# Altium PCB CSAL.PcbDoc
Units mm, origin at the board's own origin, x right, y up, seen from the top; angles counter-clockwise.
Board outline 60 x 50 mm, 2 copper layers (Top Layer, Bottom Layer); 52 components, 31 nets, 154 pads, 25 vias.
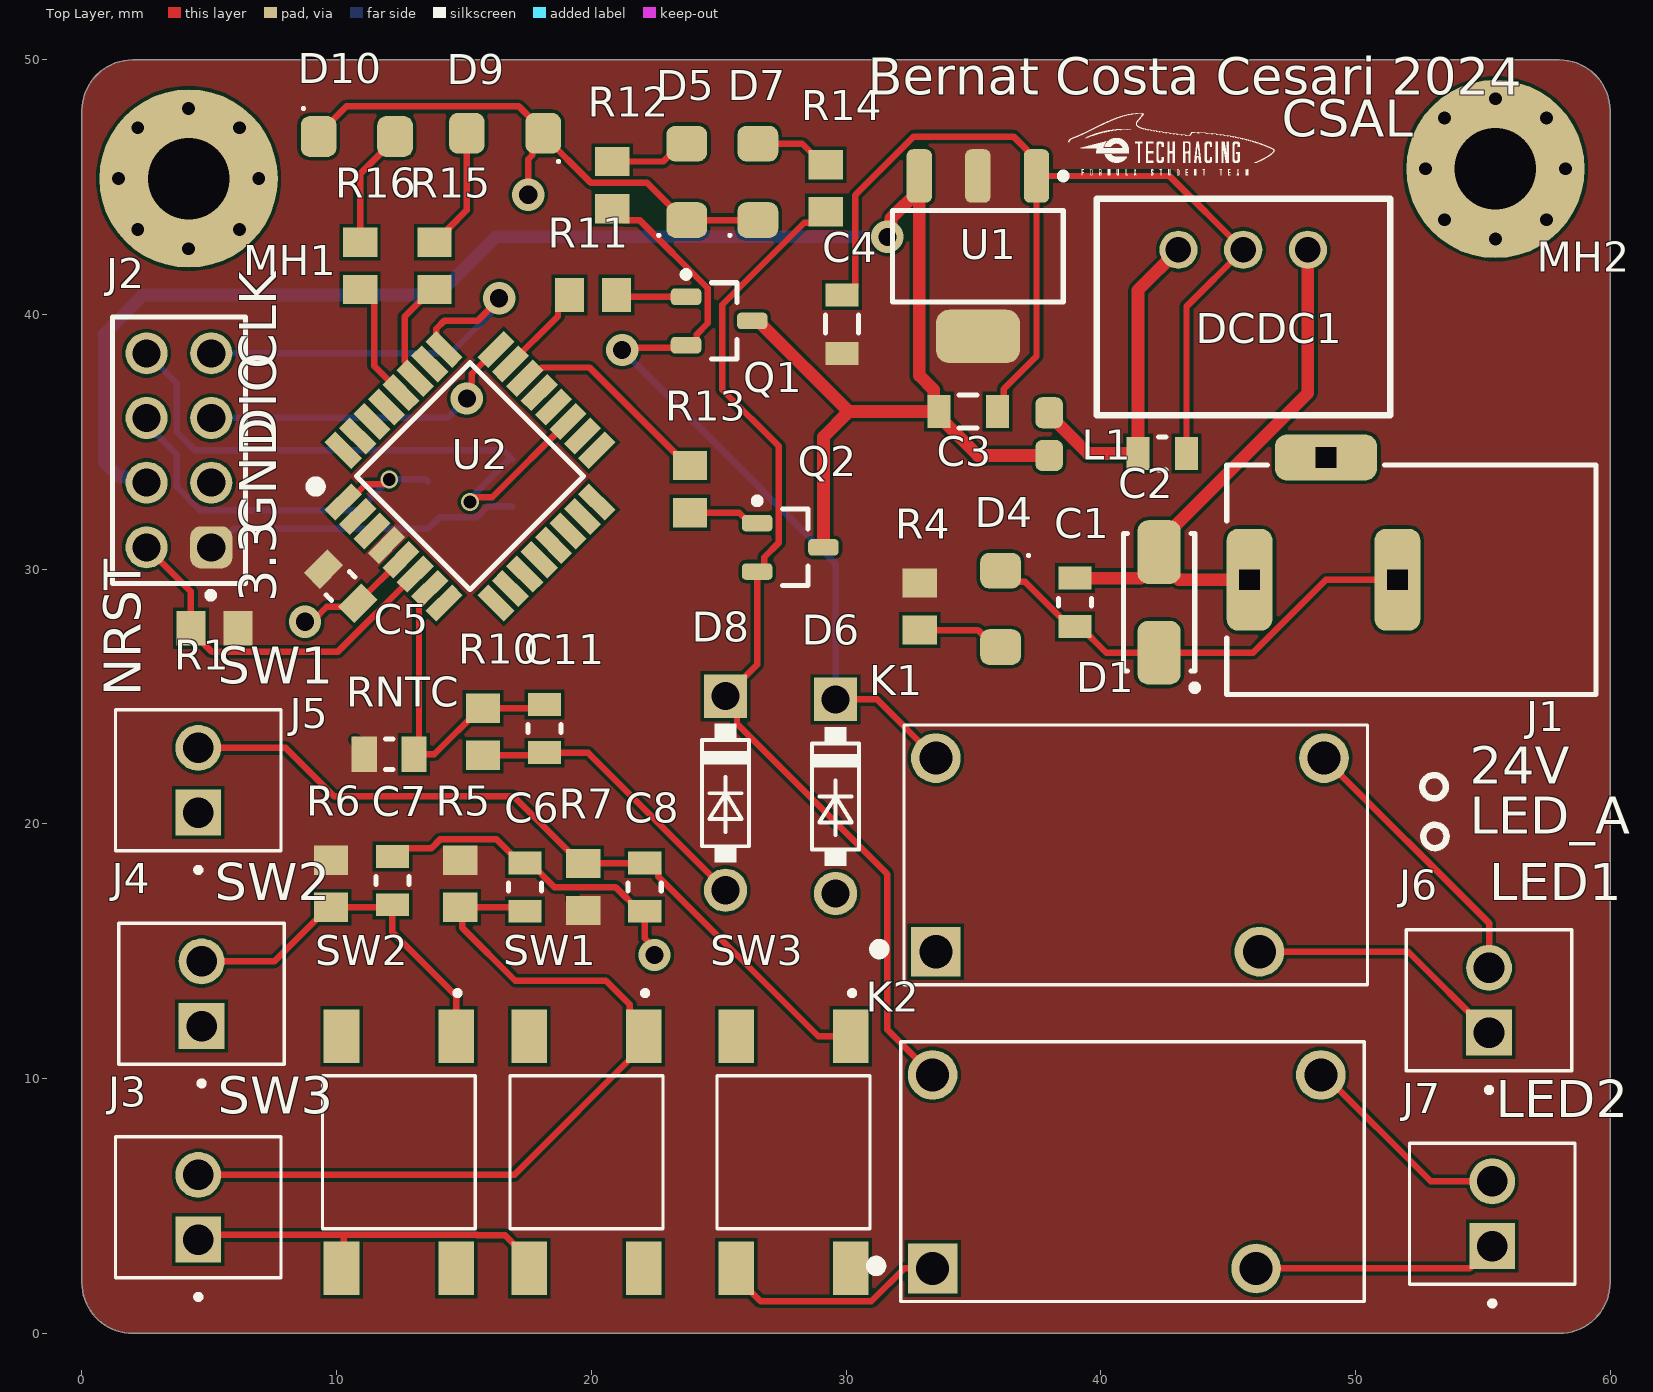
[diagram p0: Top Layer view]
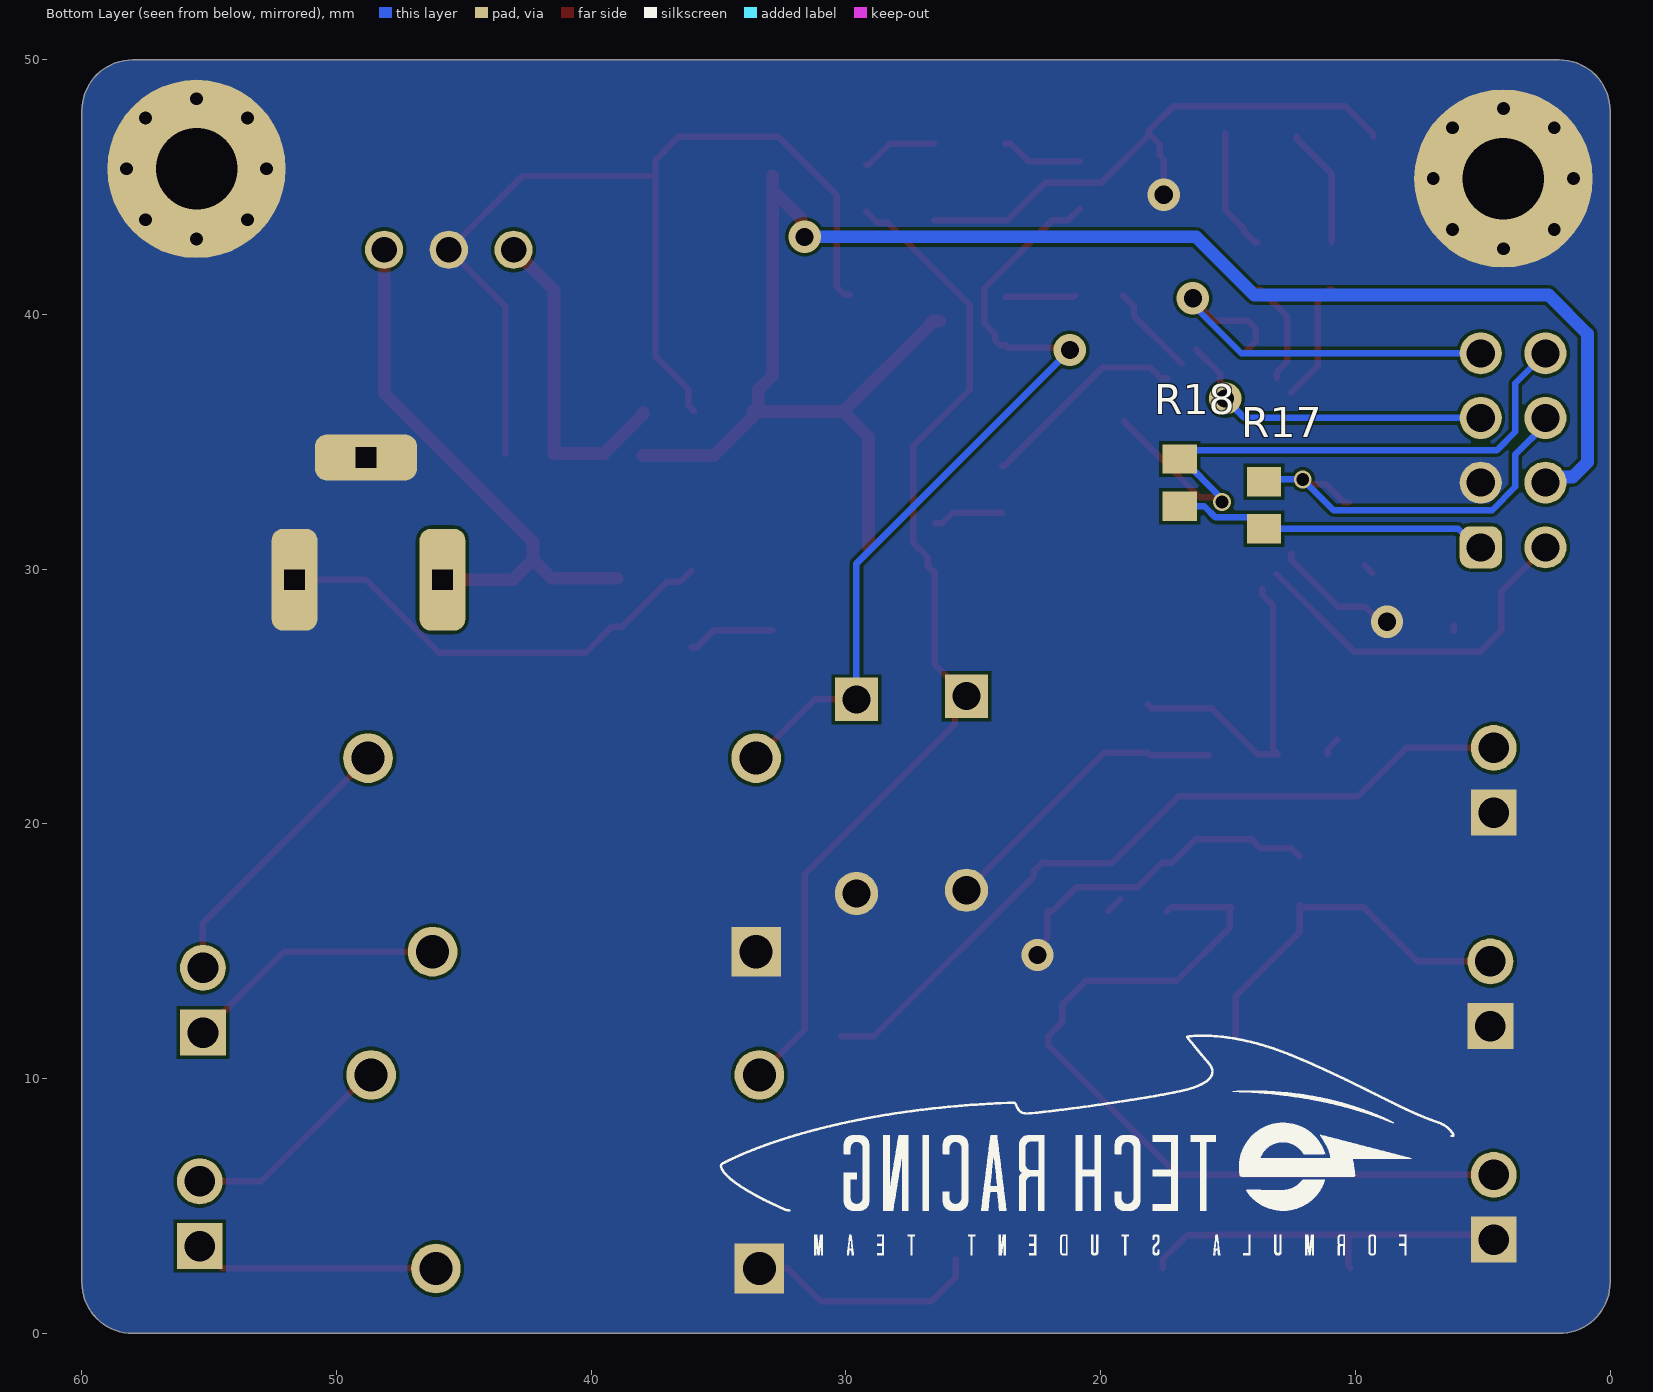
[diagram p1: Bottom Layer view, seen from below]
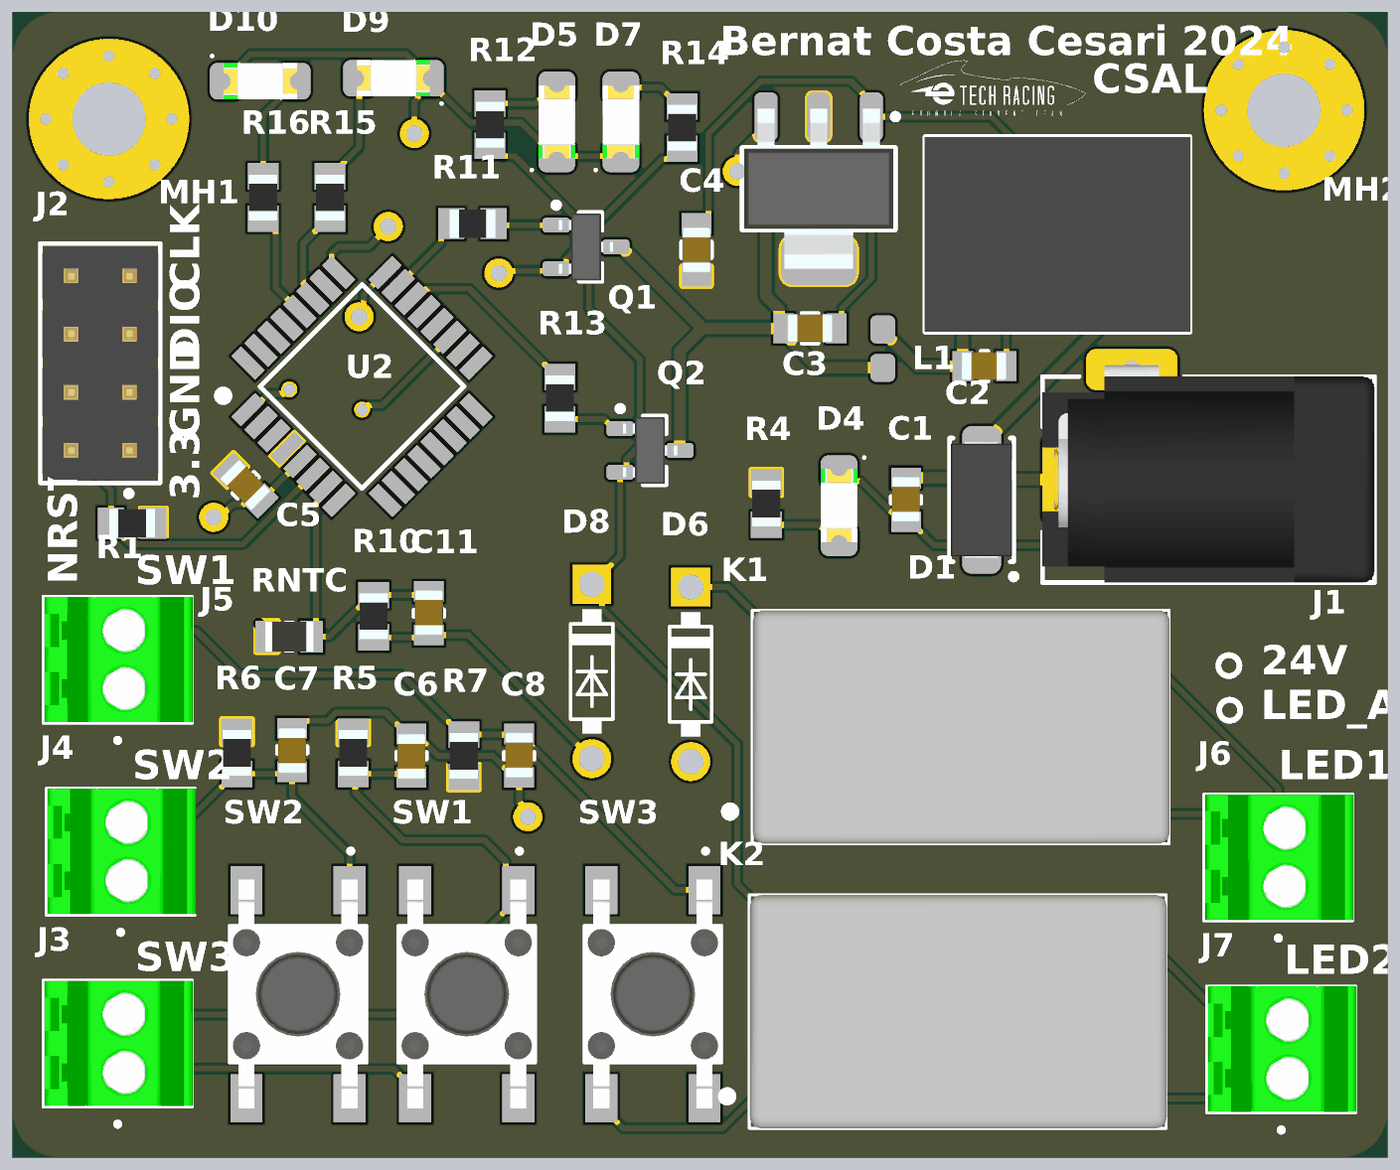
[diagram p2: 3D render of the assembled board from above, using the file's embedded part models]

## Layer stack, top to bottom
Top Solder: solder mask 0.0102, Solder Resist, Dk 3.5
Top Layer: signal copper 0.0356
Dielectric 1: dielectric 0.32, FR-4, Dk 4.8
Bottom Layer: signal copper 0.0356
Bottom Solder: solder mask 0.0102, Solder Resist, Dk 3.5

## Board outline
2,0 cw(c2,2) 0,2 0,48 cw(c2,48) 2,50 58,50 cw(c58,48) 60,48 60,2 cw(c58,2) 58,0

## Design rules (kind name [scope] priority, off if disabled: settings)
Clearance [All] p1: gap=0.127 ignorepadtopadclearanceinfootprint=FALSE
PlaneConnect [All] p1: planeconnectstyle=Direct reliefexpansion=0.508 reliefentries=4 reliefconductorwidth=0.254 reliefairgap=0.254
PolygonConnect [All] p1: connectstyle=Direct reliefconductorwidth=0.254 reliefentries=4 polygonreliefangle="90 Angle" airgapwidth=0.254
RoutingVias [All] p1: holewidth=0.5 width=0.7 viastyle="Through Hole" minholewidth=0.711 minwidth=1.27 maxholewidth=0.711 maxwidth=1.27
SolderMaskExpansion [All] p1: expansion=0.102 istentingtop=FALSE
Width [All] p1: maxlimit=0.5 minlimit=0.254 preferedwidth=0.254 minimp=50.000000 maximp=50.000000 favimp=50.000000
29 further rules are at their usual default settings.

## Components (designator, comment, footprint, x,y, rotation, side; value= is the part's Value field where it differs from the comment)
C1 "885012207098" C0805FNPC-R 38.989,28.702 r270 top
C2 "885012207098" C0805FNPC-R 42.418,34.544 r0 top
C3 "2.2uF" C0805FNPC-W 34.798,36.195 r0 top
C4 "2.2uF" C0805FNPC-W 29.845,39.624 r90 top
C5 "885012207098" C0805FNPC-R 10.16,29.337 r315 top
C6 "885012207098" C0805FNPC-R 17.399,17.526 r90 top
C7 "885012207098" C0805FNPC-R 12.192,17.78 r90 top
C8 "885012207098" C0805FNPC-R 22.098,17.526 r270 top
C11 "885012207098" C0805FNPC-R 18.161,23.749 r270 top
D1 "824501261" DTVS-DO-214AC 42.291,28.702 r270 top
D4 "150120YS75000" LED_1206_WE 36.068,28.448 r270 top
D5 "150120GS75000" LED_1206_WE 23.749,45.212 r90 top
D6 "D_THT_1N4004" D_THT 29.591,21.082 r270 top
D7 "150120RS75000" LED_1206_WE 26.543,45.212 r90 top
D8 "D_THT_1N4004" D_THT 25.273,21.209 r270 top
D9 "150120BS75000" LED_1206_WE 16.613,47.117 r180 top
D10 "150120BS75000" LED_1206_WE 10.795,46.99 r0 top
DCDC1 "173010542" DCDC_Magi3c 45.593,42.545 r0 top
J1 "694108301002" 694108301002 52.197,29.591 r90 top
J2 "STLink Wattius RJ45" STLINK_RJ45 3.81,34.671 r90 top
J3 "J_2_CableContact" TE_282834-2 4.572,4.953 r90 top
J4 "J_2_CableContact" TE_282834-2 4.699,13.335 r90 top
J5 "J_2_CableContact" TE_282834-2 4.572,21.717 r90 top
J6 "J_2_CableContact" TE_282834-2 55.245,13.081 r90 top
J7 "J_2_CableContact" TE_282834-2 55.372,4.699 r90 top
K1 "RELAY_12VDC" RELAY_1461402-6 41.148,18.786 r0 top
K2 "RELAY_12VDC" RELAY_1461402-6 41.021,6.35 r0 top
L1 "BLM18EG331TN1D" L_Ferrite_Bead_0805 37.973,35.306 r270 top
MH1 "Mounting_Hole_M3" Mounting_Hole_M3 4.191,45.339 r0 top
MH2 "Mounting_Hole_M3" Mounting_Hole_M3 55.499,45.72 r0 top
Q1 "BC817-25LT1G" TRT-NPN-0.5/45-SOT23 25.019,39.751 r0 top
Q2 "BC817-25LT1G" TRT-NPN-0.5/45-SOT23 27.813,30.861 r0 top
R1 "CR0805-JW-103ELF" R0805FTK 5.207,27.686 r180 top
R4 "CR0805-JW-102ELF" R0805FTK 32.893,28.539 r270 top
R5 "CR0805-JW-103ELF" R0805FTK 14.859,17.653 r270 top
R6 "CR0805-JW-103ELF" R0805FTK 9.779,17.653 r270 top
R7 "CR0805-JW-103ELF" R0805FTK 19.685,17.526 r90 top
R10 "CR0805-JW-103ELF" R0805FTK 15.748,23.622 r270 top
R11 "CR0805-JW-102ELF" R0805FTK 20.066,40.767 r0 top
R12 "CR0805-FX-4700GLF" R0805FTK 20.828,45.085 r90 top
R13 "CR0805-JW-102ELF" R0805FTK 23.876,33.147 r270 top
R14 "CR0805-FX-4700GLF" R0805FTK 29.21,44.958 r90 top
R15 "CR0805-FX-4700GLF" R0805FTK 13.843,41.91 r90 top
R16 "CR0805-FX-4700GLF" R0805FTK 10.922,41.91 r90 top
R17 "CR0805-JW-103ELF" R0805FTK 13.589,32.512 r90 bottom
R18 "CR0805-JW-103ELF" R0805FTK 16.891,33.401 r90 bottom
RNTC "NTC10k" NTC10k_0805 12.065,22.733 r0 top
SW1 "Tactile SW" SW_2-1437565-7 19.812,7.112 r270 top
SW2 "Tactile SW" SW_2-1437565-7 12.446,7.112 r270 top
SW3 "Tactile SW" SW_2-1437565-7 27.94,7.112 r270 top
U1 "LM1117IMP-3.3/NOPB" LDO_10V-0.8/3V3-SOT223 35.179,42.291 r270 top
U2 "STM32C031K4T6" QFP80P900X900X160-32N 15.24,33.655 r45 top

## Footprints (in the part's own frame and the unit in brackets; to place one, negate y for a bottom-side part, rotate by r counter-clockwise, add the part's x,y. Pads: shape width x height; smd on the part's side, far side on the other; paste and mask are expansions set on the pad)
694108301002 [mm] "DC Power Jack Right Angled(6.4)"
  rrect50% 4x1.8 hole 0.8 square: 1(0,6.35) 2(0,0.55)
  rrect50% 1.8x4 hole 0.8 square: 3(4.8,3.35)
  silkscreen extent -4.5,-7.25 4.5,7.25, body extent -4.5,-7.25 5,7.25, height 10.75
C0805FNPC-R [mm]
  rect 0.9x1.3 smd: 1(-0.95,0) 2(0.95,0)
  silkscreen extent -0.15,-0.65 0.15,0.65, body extent -1.03,-0.63 0.97,0.63, height 0.96
C0805FNPC-W [mm]
  rect 0.9x1.3 smd: 1(-1.15,0) 2(1.15,0)
  silkscreen extent -0.35,-0.65 0.35,0.65, body extent -1,-0.63 1,0.63, height 0.96
D_THT [mm]
  round 1.7 hole 1.1: A(3.81,0)
  rect 1.7x1.7 hole 1.1: C(-3.81,0)
  silkscreen extent -2.72,-0.95 2.72,0.92
DCDC_Magi3c [mm]
  round 1.5 hole 1: 1(2.54,0) 2(0,0) 3(-2.54,0)
  silkscreen extent -5.75,-6.5 5.77,2, body extent -5.8,-6.5 5.8,2, height 10.2
DTVS-DO-214AC [mm] "Molded Diode, 2-Leads, Body 5,11x2,67mm, IPC Medium Density"
  rrect50% 2.5x1.7 smd: 1(-1.975,0) 2(1.975,0)
  silkscreen extent -2.7,-1.4 3.47,1.53, body extent -2.56,-1.34 2.56,1.34, height 2.5
L_Ferrite_Bead_0805 [mm] "Chip Inductor, 2-Leads, Body 1,60x0,80mm, IPC Low Density"
  rrect50% 1.22x1.08 smd: 1(-0.84,0) 2(0.84,0)
  body extent -0.88,-0.48 0.87,0.47, height 0.65
LDO_10V-0.8/3V3-SOT223 [mm] "SOT223, 4-Leads, Body 6,50x7,00mm (avg), Pitch 2,30mm, IPC Low Density"
  rrect50% 2.1x1 smd: 1(-3.15,2.3) 2(-3.15,0) 3(-3.15,-2.3)
  rrect50% 2.1x3.3 smd: 4(3.15,0)
  silkscreen extent -3.27,-3.35 1.8,3.48, body extent -3.5,-3.25 3.5,3.25, height 1.81
LED_1206_WE [mm] "SODFL, 2-Leads, Body 1,60x3,20mm, IPC Medium Density"
  rrect50% 1.4x1.6 smd: A(1.5,0) K(-1.5,0)
  silkscreen extent -2.15,1.05 -2.05,1.15, body extent -1.6,-0.8 1.6,0.8, height 0.68
Mounting_Hole_M3 [mm]
  round 7 hole 3.2: 1(0,0)
NTC10k_0805 [mm] "Chip Resistor, 2-Leads, Body 1,00x0,50mm, IPC Medium Density"
  rect 1x1.4 smd: 1(-0.975,0) 2(0.975,0)
  silkscreen extent -0.15,-0.6 0.15,0.6, body extent -1.05,-0.65 1.05,0.65, height 0.8
QFP80P900X900X160-32N [mm]
  rect 1.475x0.6 smd: 1(-4.238,2.8) 2(-4.238,2) 3(-4.238,1.2) 4(-4.238,0.4) 5(-4.238,-0.4) 6(-4.238,-1.2) 7(-4.238,-2) 8(-4.238,-2.8) 17(4.238,-2.8) 18(4.238,-2) 19(4.238,-1.2) 20(4.238,-0.4) 21(4.238,0.4) 22(4.238,1.2) 23(4.238,2) 24(4.238,2.8)
  rect 0.6x1.475 smd: 9(-2.8,-4.238) 10(-2,-4.238) 11(-1.2,-4.238) 12(-0.4,-4.238) 13(0.4,-4.238) 14(1.2,-4.238) 15(2,-4.238) 16(2.8,-4.238) 25(2.8,4.238) 26(2,4.238) 27(1.2,4.238) 28(0.4,4.238) 29(-0.4,4.238) 30(-1.2,4.238) 31(-2,4.238) 32(-2.8,4.238)
  silkscreen extent -4.77,-3.15 3.15,4.2
R0805FTK [mm] "Chip Resistor, 2-Leads, Body 2,00x1,25mm, IPC Medium Density"
  rect 1.15x1.35 smd: 1(-0.925,0) 2(0.925,0)
  body extent -1,-0.63 1,0.63, height 0.65
RELAY_1461402-6 [mm]
  round 1.95 hole 1.3: C1(-7.62,3.8) COM(5.08,-3.8) NO(7.62,3.8)
  rect 1.95x1.95 hole 1.3: C2(-7.62,-3.8)
  silkscreen extent -10.04,-5.1 9.33,5.1, body extent -8.85,-5.1 9.35,5.1, height 14.85
STLINK_RJ45 [mm] "Pin Header, pitch 2.54 mm, THT, Vertical, dual row, 8p"
  rrect50% 1.65x1.65 hole 1.1: 1(-3.81,-1.27)
  round 1.65 hole 1.1: 2(-3.81,1.27) 3(-1.27,-1.27) 4(-1.27,1.27) 5(1.27,-1.27) 6(1.27,1.27) 7(3.81,-1.27) 8(3.81,1.27)
  silkscreen extent -5.81,-2.62 5.23,2.62, body extent -5.08,-2.54 5.08,2.54, height 8.59
SW_2-1437565-7 [mm]
  rect 2.1x1.4 smd: 1(-4.55,2.25) 2(4.55,2.25) 3(-4.55,-2.25) 4(4.55,-2.25)
  silkscreen extent -6.35,-3 3,3, body extent -5,-3 5,3, height 8.5
TE_282834-2 [mm]
  rect 1.8x1.8 / inner round 1.8 / far side rect 1.8x1.8 hole 1.2: 1(-1.27,0)
  round 1.8 hole 1.2: 2(1.27,0)
  silkscreen extent -3.62,-3.25 2.77,3.25, body extent -2.73,-3.3 2.75,3.2, height 8.7
TRT-NPN-0.5/45-SOT23 [mm] "SOT23, 3-Leads, Body 2,92x2,37mm, Pitch 0,95mm, IPC Low Density"
  rrect50% 1.2x0.65 smd: B(-1.3,0.95) C(1.3,0) E(-1.3,-0.95)
  silkscreen extent -1.42,-1.5 0.7,1.95, body extent -1.18,-1.46 1.19,1.46, height 1.12

## Part data
C1 C2 C5 C6 C7 C8 C11: library part C100n-50V-0805FNPC-X7R, "Cap, 0.1ΜF, 50V, 10%, X7R, 0805", Capacitance=100nF, Case Code (Imperial)=0805, Case Code (Metric)=2012, Dielectric=X7R, Manufacturer 1="Wurth Electronics", Max Operating Temperature=125°C, Min Operating Temperature=-55°C, Supplier Part Number 1=1813493, Tolerance=10%, Voltage Rating=50V, .Creator=DR, Case/Package=0805, Category="Ceramic Capacitors", ComponentLink1Description=http://www.farnell.com/datasheets/1958498.pdf?src-supplier=Farnell, ComponentLink1URL=http://www.farnell.com/datasheets/1958498.pdf?src-supplier=Farnell, ComponentLink2Description=http://www.farnell.com/datasheets/1958498.pdf?src-supplier=Element14, ComponentLink2URL=http://www.farnell.com/datasheets/1958498.pdf?src-supplier=Element14, ComponentLink3Description=https://katalog.we-online.de/pbs/datasheet/885012207098.pdf?src-supplier=Digi-Key, ComponentLink3URL=https://katalog.we-online.de/pbs/datasheet/885012207098.pdf?src-supplier=Digi-Key, ComponentLink4Description=http://www.farnell.com/datasheets/1958498.pdf?src-supplier=Newark, ComponentLink4URL=http://www.farnell.com/datasheets/1958498.pdf?src-supplier=Newark, Length=0.079inch, Manufacturer Part Number 1=885012207098, Mount="Surface Mount", Packaging="Cut Tape", Pricing 1="100=0,10200, 500=0,07100, 2000=0,06100 (GBP)", REACH SVHC=Unknown, RoHS=Yes, RoHS Compliant=Yes, Stock 1=8000, Supplier 1=RSComponents, Thickness=0.035inch, Voltage Rating (DC)=50V, Width=0.049inch
C3 C4: library part C2.2u-16V-0805FTK
D1: library part DTVS-26V-DO-214AC, "TVS diode [Würth Elektronik] 824501261 TVS diode", Clamping Voltage=42.1V, Manufacturer="Wurth Electronics", Max Breakdown Voltage=30.4V, Max Operating Temperature=150°C, Min Operating Temperature=-65°C, Peak Pulse Current=9.5A, Peak Pulse Power=400W, Power Line Protection=No, Resistor Type=Zener, Reverse Standoff Voltage=26V, Supplier Part Number 1=9217305, .Creator=DO, Category="TVS Diodes", ComponentLink1Description=http://www.farnell.com/datasheets/2036389.pdf?src-supplier=Farnell, ComponentLink1URL=http://www.farnell.com/datasheets/2036389.pdf?src-supplier=Farnell, ComponentLink2Description=http://www.farnell.com/datasheets/2036389.pdf?src-supplier=Element14, ComponentLink2URL=http://www.farnell.com/datasheets/2036389.pdf?src-supplier=Element14, ComponentLink3Description=https://katalog.we-online.de/pbs/datasheet/824501261.pdf?src-supplier=Digi-Key, ComponentLink3URL=https://katalog.we-online.de/pbs/datasheet/824501261.pdf?src-supplier=Digi-Key, ComponentLink4Description="Where buy it", ComponentLink4URL=https://www.we-online.com/catalog/en/WE-TVSP?sq=824501261#824501261, Manufacturer Part Number=824501261, Min Breakdown Voltage=30.4V, Mount="Surface Mount", Number of Bidirectional Channels=1, Number of Pins=2, Packaging="Cut Tape", Polarity=Bidirectional, Pricing 1="50=0,29400, 250=0,26100, 500=0,21200, 1000=0,20100, 2000=0,19600 (USD)", REACH SVHC=Unknown, RoHS=Yes, RoHS Compliant=Yes, Stock 1=1, Supplier 1=RSComponents
D4: library part LEDYS-1206-120, "Led, Yellow, 590 Nm, 2 V, 30 Ma, 120 Mcd Rohs Compliant: Yes", Case Code (Imperial)=1206, Case Code (Metric)=3216, Color=Yellow, Forward Current=30mA, Forward Voltage=2V, Manufacturer="Wurth Electronics", Max Operating Temperature=85°C, Min Operating Temperature=-40°C, Package Quantity=3000, Supplier Part Number 1=95W3811, Test Current=20mA, .Creator=GP, Case/Package=1206, Category=LEDs, ComponentLink1Description=https://datasheet.ciiva.com/29561/150120ys75000-29561868.pdf?src-supplier=Digi-Key, ComponentLink1URL=https://datasheet.ciiva.com/29561/150120ys75000-29561868.pdf?src-supplier=Digi-Key, ComponentLink2Description=https://datasheet.ciiva.com/29279/759445-da-01-en-chipled-1206-w-kl-gelb-150120ys75000-29279074.pdf?src-supplier=Conrad, ComponentLink2URL=https://datasheet.ciiva.com/29279/759445-da-01-en-chipled-1206-w-kl-gelb-150120ys75000-29279074.pdf?src-supplier=Conrad, ComponentLink3Description="Where buy it", ComponentLink3URL=https://www.we-online.com/catalog/en/WL-SMCW?sq=150120YS75000#150120YS75000, Dominant Wavelength=590nm, Height=0.68mm, Length=3.2mm, Lens Style=Clear,Rectangular, Luminous Intensity=120mcd, Manufacturer Part Number=150120YS75000, Mount="Surface Mount", Packaging="Tape and Reel", Pricing 1="1=0,22700, 5=0,22700, 10=0,22100, 25=0,21300, 50=0,20700, 100=0,18200, 500=0,16200 (USD)", REACH SVHC=Unknown, RoHS=Yes, RoHS Compliant=Yes, Stock 1=7333, Supplier 1=Newark, Viewing Angle=140°, Wavelength=590nm, Width=1.6mm
D5: library part LEDGS-1206-450, "Led, Green, 520 Nm, 3.2 V, 30 Ma, 450 Mcd Rohs Compliant: Yes", Case Code (Imperial)=1206, Case Code (Metric)=3216, Color=Green, Forward Current=30mA, Forward Voltage=3.2V, Manufacturer="Wurth Electronics", Max Operating Temperature=85°C, Min Operating Temperature=-40°C, Package Quantity=3000, Supplier Part Number 1=8154247P, Test Current=20mA, .Creator=GP, Case/Package=1206, Category=LEDs, ComponentLink1Description=https://datasheet.ciiva.com/22656/150120gs75000-22656979.pdf?src-supplier=Element14, ComponentLink1URL=https://datasheet.ciiva.com/22656/150120gs75000-22656979.pdf?src-supplier=Element14, ComponentLink2Description=https://datasheet.ciiva.com/29279/759441-da-01-en-chipled-1206-w-kl-gruen-150120gs75000-29279042.pdf?src-supplier=Conrad, ComponentLink2URL=https://datasheet.ciiva.com/29279/759441-da-01-en-chipled-1206-w-kl-gruen-150120gs75000-29279042.pdf?src-supplier=Conrad, ComponentLink3Description=https://datasheet.ciiva.com/48430/150120gs75000-eng-tds-48430053.pdf?src-supplier=Distrelec, ComponentLink3URL=https://datasheet.ciiva.com/48430/150120gs75000-eng-tds-48430053.pdf?src-supplier=Distrelec, ComponentLink4Description=https://datasheet.ciiva.com/29561/150120gs75000-29561883.pdf?src-supplier=Digi-Key, ComponentLink4URL=https://datasheet.ciiva.com/29561/150120gs75000-29561883.pdf?src-supplier=Digi-Key, ComponentLink5Description=https://datasheet.ciiva.com/29561/150120gs75000-29561884.pdf?src-supplier=Digi-Key, ComponentLink5URL=https://datasheet.ciiva.com/29561/150120gs75000-29561884.pdf?src-supplier=Digi-Key, ComponentLink6Description=https://datasheet.ciiva.com/29561/150120gs75000-29561885.pdf?src-supplier=Digi-Key, ComponentLink6URL=https://datasheet.ciiva.com/29561/150120gs75000-29561885.pdf?src-supplier=Digi-Key, ComponentLink7Description="Where buy it", ComponentLink7URL=https://www.we-online.com/catalog/en/WL-SMCW?sq=150120GS75000#150120GS75000, Dominant Wavelength=520nm, Height=0.68mm, Length=3.2mm, Lens Style=Clear,Rectangular, Luminous Intensity=450mcd, Manufacturer Part Number=150120GS75000, Mount="Surface Mount", Packaging="Tape and Reel", Pricing 1="50=0,23200, 500=0,16400, 750=0,15500, 1500=0,15000, 3000=0,14200 (USD)", REACH SVHC=Unknown, RoHS=Yes, RoHS Compliant=Yes, Stock 1=1, Supplier 1=RSComponents, Viewing Angle=140°, Wavelength=520nm, Width=1.6mm
D6 D8: "Diode Standard 400V 1A Through Hole DO-41", Package="DO-41 Diodes Inc.", Availability=Good, Check_prices=https://www.snapeda.com/parts/1N4004/ON%20Semiconductor/view-part/2776954/?ref=eda, MF="ON Semiconductor", MP=1N4004, Price=None, SnapEDA_Link=https://www.snapeda.com/parts/1N4004/ON%20Semiconductor/view-part/2776954/?ref=snap
D7: library part LEDRS-1206-150, "Led, Red, 625 Nm, 2 V, 30 Ma, 150 Mcd Rohs Compliant: Yes", Case Code (Imperial)=1206, Case Code (Metric)=3216, Color=Red, Forward Current=30mA, Forward Voltage=2V, Manufacturer="Wurth Electronics", Max Operating Temperature=85°C, Min Operating Temperature=-40°C, Package Quantity=1, Supplier Part Number 1=8154256P, Test Current=20mA, .Creator=GP, Case/Package=1206, Category=LEDs, ComponentLink1Description=https://datasheet.ciiva.com/29561/150120rs75000-29561888.pdf?src-supplier=Digi-Key, ComponentLink1URL=https://datasheet.ciiva.com/29561/150120rs75000-29561888.pdf?src-supplier=Digi-Key, ComponentLink2Description=https://datasheet.ciiva.com/29279/759442-da-01-en-chipled-1206-w-kl-rot-150120rs75000-29279067.pdf?src-supplier=Conrad, ComponentLink2URL=https://datasheet.ciiva.com/29279/759442-da-01-en-chipled-1206-w-kl-rot-150120rs75000-29279067.pdf?src-supplier=Conrad, ComponentLink3Description=https://datasheet.ciiva.com/22656/1911465-22656982.pdf?src-supplier=Element14, ComponentLink3URL=https://datasheet.ciiva.com/22656/1911465-22656982.pdf?src-supplier=Element14, ComponentLink4Description=https://datasheet.ciiva.com/48430/150120rs75000-eng-tds-48430054.pdf?src-supplier=Distrelec, ComponentLink4URL=https://datasheet.ciiva.com/48430/150120rs75000-eng-tds-48430054.pdf?src-supplier=Distrelec, ComponentLink5Description="Where buy it", ComponentLink5URL=https://www.we-online.com/catalog/en/WL-SMCW#/articles/WL-SMCW-1206, Dominant Wavelength=625nm, Height=0.68mm, Length=3.2mm, Lens Style=Clear,Rectangular, Luminous Intensity=150mcd, Manufacturer Part Number=150120RS75000, Mount="Surface Mount", Packaging="Tape and Reel", Pricing 1="50=0,23200, 500=0,16400, 750=0,15500, 1500=0,15000, 3000=0,14200 (USD)", REACH SVHC=Unknown, RoHS=Yes, RoHS Compliant=Yes, Stock 1=1, Supplier 1=RSComponents, Viewing Angle=140°, Wavelength=625nm, Width=1.6mm
D9 D10: library part LEDBS-1206-145, "Led, Blue, 470 Nm, 3.2 V, 30 Ma, 145 Mcd Rohs Compliant: Yes", Case Code (Imperial)=1206, Case Code (Metric)=3216, Color=Blue, Forward Current=30mA, Forward Voltage=3.2V, Manufacturer="Wurth Electronics", Max Operating Temperature=85°C, Min Operating Temperature=-40°C, Package Quantity=3000, Supplier Part Number 1=8154243, Test Current=20mA, .Creator=GP, Case/Package=1206, Category=LEDs, ComponentLink1Description=https://datasheet.ciiva.com/22656/150120bs75000-22656976.pdf?src-supplier=Element14, ComponentLink1URL=https://datasheet.ciiva.com/22656/150120bs75000-22656976.pdf?src-supplier=Element14, ComponentLink2Description=https://datasheet.ciiva.com/29279/759440-da-01-en-chipled-1206-w-kl-blau-150120bs75000-29279045.pdf?src-supplier=Conrad, ComponentLink2URL=https://datasheet.ciiva.com/29279/759440-da-01-en-chipled-1206-w-kl-blau-150120bs75000-29279045.pdf?src-supplier=Conrad, ComponentLink3Description=https://datasheet.ciiva.com/29561/150120bs75000-29561882.pdf?src-supplier=Digi-Key, ComponentLink3URL=https://datasheet.ciiva.com/29561/150120bs75000-29561882.pdf?src-supplier=Digi-Key, ComponentLink4Description="Where buy it", ComponentLink4URL=https://www.we-online.com/catalog/en/WL-SMCW?sq=150120BS75000#150120BS75000, Dominant Wavelength=470nm, Height=0.68mm, Length=3.2mm, Lens Style=Clear,Rectangular, Luminous Intensity=145mcd, Manufacturer Part Number=150120BS75000, Mount="Surface Mount", Packaging="Tape and Reel", Pricing 1="50=0,23200, 500=0,16400, 750=0,15500, 1500=0,15000, 3000=0,14200 (USD)", REACH SVHC=Unknown, RoHS=Yes, RoHS Compliant=Yes, Stock 1=1, Supplier 1=RSComponents, Viewing Angle=140°, Wavelength=470nm, Width=1.6mm
DCDC1: library part DCDC-42V/5V-1A, "Würth Elektronik 8-42V to 5V 1A DC-DC", Manufacturer 1="Wurth Electronics", Max Input Voltage=42V, Max Operating Temperature=85°C, Max Output Current=1A, Min Input Voltage=8V, Min Operating Temperature=-40°C, Supplier Part Number 1=1447809, Voltage - Output 1=5V, .Creator=DR, ComponentLink1Description=http://www.farnell.com/datasheets/2192895.pdf?src-supplier=Farnell, ComponentLink1URL=http://www.farnell.com/datasheets/2192895.pdf?src-supplier=Farnell, ComponentLink2Description=http://www.farnell.com/datasheets/2192895.pdf?src-supplier=Newark, ComponentLink2URL=http://www.farnell.com/datasheets/2192895.pdf?src-supplier=Newark, ComponentLink3Description=https://katalog.we-online.de/pm/datasheet/173010542.pdf?src-supplier=Digi-Key, ComponentLink3URL=https://katalog.we-online.de/pm/datasheet/173010542.pdf?src-supplier=Digi-Key, Efficiency=93%, Features=UVLO,OCP,OTP,SCP, Manufacturer Part Number 1=173010542, Mount="Through Hole", Number of Outputs=1, Packaging=Rail/Tube, Pricing 1="1=12,22500, 8=10,96900, 21=10,68900 (USD)", RoHS=Yes, RoHS Compliant=Yes, Stock 1=1, Supplier 1=RSComponents
J1: library part Supply_Jack_12V, "WR-DC DC Power Jack Connector, Male, Right Angled, 24V, 5A", Manufacturer="Wurth Elektronik", Operating Temperature Max=85°C, Operating Temperature Min=-40°C, Rated Current=5A, Working Voltage=24V, Category="DC Power Jack Connector", ComponentLink1Description="Website Link", ComponentLink1URL=https://www.we-online.com/redexpert/article/694108301002?ad, ComponentLink2Description="Datasheet Link", ComponentLink2URL=https://www.we-online.com/redexpert/spec/694108301002?ad, Gender=Male, Manufacturer Part Number=694108301002, Match Code=WR-DC, Mount="Through Hole", Opening Diameter=6.4mm, Orientation="Right Angled", Packaging=Bag, Plug Inner Diameter=2.55mm, Plug Outer Diameter=5.5mm
J2: library part STLink_Wattius_RJ45_Adapter
J3 J4 J5 J6 J7: Package=None, Availability=Unavailable, MF="{'manufacturer': u'TE Connectivity'}", MP=282834-2, Price=None
L1: library part L_Ferrite_bead_BLM18EG331TN1D, "Ferrite Beads Multi-Layer 330Ohm 25% 100MHz 500mA 210mOhm DCR 0603 Paper T/R", Case Code (Imperial)=0603, Case Code (Metric)=1608, Current Rating=500mA, DC Resistance (DCR)=210mR, Manufacturer=Murata, Max Operating Temperature=125°C, Min Operating Temperature=-55°C, Package Quantity=1, Supplier Part Number 1=490-5913-1-ND, Test Frequency=100MHz, Tolerance=25%, .Creator=GP, Case/Package=0603, Category="Ferrite Beads and Chips", ComponentLink1Description=https://datasheet.ciiva.com/1467/5169-1467232.pdf?src-supplier=Element14, ComponentLink1URL=https://datasheet.ciiva.com/1467/5169-1467232.pdf?src-supplier=Element14, ComponentLink2Description=https://datasheet.ciiva.com/11795/0900766b811b5866-11795405.pdf?src-supplier=RSComponents, ComponentLink2URL=https://datasheet.ciiva.com/11795/0900766b811b5866-11795405.pdf?src-supplier=RSComponents, ComponentLink3Description=https://datasheet.ciiva.com/41449/001172267-da-01-en-drossel-0603-330r-1-6x0-8mm-4000st-41449581.pdf?src-supplier=Conrad, ComponentLink3URL=https://datasheet.ciiva.com/41449/001172267-da-01-en-drossel-0603-330r-1-6x0-8mm-4000st-41449581.pdf?src-supplier=Conrad, ComponentLink4Description=https://datasheet.ciiva.com/1467/5169-1467233.pdf?src-supplier=Element14, ComponentLink4URL=https://datasheet.ciiva.com/1467/5169-1467233.pdf?src-supplier=Element14, ComponentLink5Description=https://datasheet.ciiva.com/1561/5169-1561345.pdf?src-supplier=Newark, ComponentLink5URL=https://datasheet.ciiva.com/1561/5169-1561345.pdf?src-supplier=Newark, ComponentLink6Description=https://datasheet.ciiva.com/3082/l0110s0101blm18e-3082714.pdf?src-supplier=Avnet, ComponentLink6URL=https://datasheet.ciiva.com/3082/l0110s0101blm18e-3082714.pdf?src-supplier=Avnet, ComponentLink7Description=https://datasheet.ciiva.com/6211/l0110s0101blm18e-6211470.pdf?src-supplier=Digi-Key, ComponentLink7URL=https://datasheet.ciiva.com/6211/l0110s0101blm18e-6211470.pdf?src-supplier=Digi-Key, ComponentLink8Description=https://datasheet.ciiva.com/6211/l0110s0101blm18e-6211471.pdf?src-supplier=Digi-Key, ComponentLink8URL=https://datasheet.ciiva.com/6211/l0110s0101blm18e-6211471.pdf?src-supplier=Digi-Key, Core Material=Ferrite, Depth=0.8mm, Height=0.8mm, Impedance=330R, Lead Free="Lead Free", Length=1.6mm, Manufacturer Part Number=BLM18EG331TN1D, Material=Ferrite,Steel, Max Current Rating=500mA, Max DC Current=500mA, Number of Circuits=1, Number of Lines=1, Number of Pins=2, Packaging="Tape and Reel", Pricing 1="1=0,23000, 10=0,17500, 25=0,14520, 50=0,12520, 100=0,11260, 250=0,09508, 500=0,08508, 1000=0,07257 (USD)", REACH SVHC="No SVHC", Resistance=210mR, RoHS=Yes, RoHS Compliant=Yes, Series=BLM18E, Stock 1=20037, Supplier 1=Digi-Key, Termination=SMD/SMT, Width=0.8mm
Q1 Q2: library part TRT-NPN-0.5/45-SOT23, "ON Semi BC817-25LT1G NPN Bipolar Transistor; 0.5 A; 45 V; 3-Pin SOT-23", Case/Package=SOT-23-3, Collector Base Voltage (VCBO)=50V, Collector Emitter Breakdown Voltage=45V, Collector Emitter Saturation Voltage=700mV, Current Rating=500mA, Emitter Base Voltage (VEBO)=5V, Frequency=100MHz, Package Quantity=1, Power Dissipation=300mW, Supplier Part Number 1=BC817-25LT1GOSCT-ND, .Creator=GP, Category=Transistor, Collector Emitter Voltage (VCEO)=45V, Collector-emitter Voltage-Max=700mV, ComponentLink1Description=Datasheet, ComponentLink2Description="Where buy it", ComponentLink3Description=https://datasheet.ciiva.com/27748/2010413-27748829.pdf?src-supplier=Jameco, ComponentLink3URL=https://datasheet.ciiva.com/27748/2010413-27748829.pdf?src-supplier=Jameco, ComponentLink4Description=https://datasheet.ciiva.com/15138/getdatasheetpartid-38405-15138602.pdf?src-supplier=Verical, ComponentLink4URL=https://datasheet.ciiva.com/15138/getdatasheetpartid-38405-15138602.pdf?src-supplier=Verical, ComponentLink5Description=https://datasheet.ciiva.com/1196/bc817-16lt1-d-1196558.pdf?src-supplier=Element14, ComponentLink5URL=https://datasheet.ciiva.com/1196/bc817-16lt1-d-1196558.pdf?src-supplier=Element14, ComponentLink6Description=https://datasheet.ciiva.com/22641/bc817-16lt1-d-22641013.pdf?src-supplier=Farnell, ComponentLink6URL=https://datasheet.ciiva.com/22641/bc817-16lt1-d-22641013.pdf?src-supplier=Farnell, ComponentLink7Description=https://datasheet.ciiva.com/22664/bc817-16lt1-d-22664204.pdf?src-supplier=Element14, ComponentLink7URL=https://datasheet.ciiva.com/22664/bc817-16lt1-d-22664204.pdf?src-supplier=Element14, ComponentLink8Description=https://datasheet.ciiva.com/22664/1842041-22664101.pdf?src-supplier=Element14, ComponentLink8URL=https://datasheet.ciiva.com/22664/1842041-22664101.pdf?src-supplier=Element14, ComponentLink9Description=https://datasheet.ciiva.com/4722/bc817-16lt1-d-104560-4722229.pdf?src-supplier=Mouser, ComponentLink9URL=https://datasheet.ciiva.com/4722/bc817-16lt1-d-104560-4722229.pdf?src-supplier=Mouser, ComponentLink10Description=https://datasheet.ciiva.com/1195/bc817-16lt1-d-1195763.pdf?src-supplier=Element14, ComponentLink10URL=https://datasheet.ciiva.com/1195/bc817-16lt1-d-1195763.pdf?src-supplier=Element14, ComponentLink11Description=https://datasheet.ciiva.com/1195/bc817-16lt1-d-1195764.pdf?src-supplier=Element14, ComponentLink11URL=https://datasheet.ciiva.com/1195/bc817-16lt1-d-1195764.pdf?src-supplier=Element14, ComponentLink12Description=https://datasheet.ciiva.com/11197/bc817-16lt1-d-11197514.pdf?src-supplier=Avnet, ComponentLink12URL=https://datasheet.ciiva.com/11197/bc817-16lt1-d-11197514.pdf?src-supplier=Avnet, ComponentLink13Description=https://datasheet.ciiva.com/25996/bc817-16lt1-d-25996327.pdf?src-supplier=Avnet+Europe, ComponentLink13URL=https://datasheet.ciiva.com/25996/bc817-16lt1-d-25996327.pdf?src-supplier=Avnet+Europe, ComponentLink14Description=https://datasheet.ciiva.com/976/bc817-16lt1-d-976357.pdf?src-supplier=Digi-Key, ComponentLink14URL=https://datasheet.ciiva.com/976/bc817-16lt1-d-976357.pdf?src-supplier=Digi-Key, ComponentLink15Description=https://datasheet.ciiva.com/976/bc817-16lt1-d-976358.pdf?src-supplier=Digi-Key, ComponentLink15URL=https://datasheet.ciiva.com/976/bc817-16lt1-d-976358.pdf?src-supplier=Digi-Key, ComponentLink16Description=https://datasheet.ciiva.com/976/bc817-16lt1-d-976356.pdf?src-supplier=Digi-Key, ComponentLink16URL=https://datasheet.ciiva.com/976/bc817-16lt1-d-976356.pdf?src-supplier=Digi-Key, Contact Plating=Tin,Matte, Element Configuration=Single, Gain Bandwidth Product=100MHz, Halogen Free="Halogen Free", Height=0.94mm, hFE Min=160, Lead Free="Lead Free", Length=2.9mm, Max Breakdown Voltage=45V, Max Collector Current=500mA, Max Frequency=100MHz, Number of Elements=1, Number of Pins=3, Pricing 1="1=0,20000, 10=0,18500, 100=0,10080, 500=0,06204, 1000=0,04229 (USD)", Radiation Hardening=No, REACH SVHC="No SVHC", RoHS Compliant=Yes, Series=-, Supplier 1=Digi-Key, Transition Frequency=100MHz, Width=1.3mm
R1 R5 R6 R7 R10 R17 R18: library part R10k-0805FTK, "BOURNS         CR0805-JW-103ELF            Surface Mount Chip Resistor, Thick Film, CR Series, 10 kohm, 125 mW,  5%, 150 V", Case Code (Imperial)=0805, Case Code (Metric)=2012, Manufacturer 1=Bourns, Max Operating Temperature=155°C, Max power dissipation=125mW, Min Operating Temperature=-55°C, Package Quantity=1, Resistance=10kR, Resistance Tolerance=5%, Resistor Type="Thick Film", Temperature Coefficient=200ppm/°C, Voltage Rating=150V, Voltage Rating (DC)=100V, .Creator=DR, Case/Package=0805, Category="Chip SMD Resistors", ComponentLink1Description=https://datasheet.ciiva.com/11821/0900766b80fcdb72-11821135.pdf?src-supplier=RSComponents, ComponentLink1URL=https://datasheet.ciiva.com/11821/0900766b80fcdb72-11821135.pdf?src-supplier=RSComponents, ComponentLink2Description=https://datasheet.ciiva.com/9122/chpreztr-9122374.pdf?src-supplier=Avnet, ComponentLink2URL=https://datasheet.ciiva.com/9122/chpreztr-9122374.pdf?src-supplier=Avnet, ComponentLink3Description=https://datasheet.ciiva.com/22693/1902866-22693254.pdf?src-supplier=Element14, ComponentLink3URL=https://datasheet.ciiva.com/22693/1902866-22693254.pdf?src-supplier=Element14, ComponentLink4Description=https://datasheet.ciiva.com/7986/691949-7986187.pdf?src-supplier=Element14, ComponentLink4URL=https://datasheet.ciiva.com/7986/691949-7986187.pdf?src-supplier=Element14, ComponentLink5Description=https://datasheet.ciiva.com/30065/159chpreztr-30065976.pdf?src-supplier=Onlinecomponents.com, ComponentLink5URL=https://datasheet.ciiva.com/30065/159chpreztr-30065976.pdf?src-supplier=Onlinecomponents.com, ComponentLink6Description=https://datasheet.ciiva.com/16783/70154685-16783482.pdf?src-supplier=Allied+Electronics, ComponentLink6URL=https://datasheet.ciiva.com/16783/70154685-16783482.pdf?src-supplier=Allied+Electronics, ComponentLink7Description=https://datasheet.ciiva.com/5548/chpreztr-5548491.pdf?src-supplier=Mouser, ComponentLink7URL=https://datasheet.ciiva.com/5548/chpreztr-5548491.pdf?src-supplier=Mouser, ComponentLink8Description=https://datasheet.ciiva.com/6559/chpreztr-6559900.pdf?src-supplier=Digi-Key, ComponentLink8URL=https://datasheet.ciiva.com/6559/chpreztr-6559900.pdf?src-supplier=Digi-Key, ComponentLink9Description=https://datasheet.ciiva.com/6559/chpreztr-6559901.pdf?src-supplier=Digi-Key, ComponentLink9URL=https://datasheet.ciiva.com/6559/chpreztr-6559901.pdf?src-supplier=Digi-Key, ComponentLink10Description=https://datasheet.ciiva.com/7985/1856384-7985869.pdf?src-supplier=Element14, ComponentLink10URL=https://datasheet.ciiva.com/7985/1856384-7985869.pdf?src-supplier=Element14, ComponentLink11Description=https://datasheet.ciiva.com/48692/001055517-da-01-en-smd-wid-cr0805-jw-103elf-10k-ohm-1-8w-48692118.pdf?src-supplier=Conrad, ComponentLink11URL=https://datasheet.ciiva.com/48692/001055517-da-01-en-smd-wid-cr0805-jw-103elf-10k-ohm-1-8w-48692118.pdf?src-supplier=Conrad, Construction=Rectangular, Contact Plating=Tin, Depth=1.25mm, Features="Moisture Resistant", Height=0.5mm, Length=2mm, Manufacturer Part Number 1=CR0805-JW-103ELF, Military Standard=Not, Mount="Surface Mount", Number of Pins=2, Number of Terminations=2, Packaging="Tape and Reel", Power rating=125mW, Pricing 1="1=0,05790, 10=0,01540, 25=0,01340, 100=0,00340 (USD)", Radiation Hardening=No, REACH SVHC="No SVHC", RoHS=Yes, RoHS Compliant=Yes, Series=CR0805, Stock 1=57566, Supplier 1="Arrow Electronics", Supplier Part Number 1=CR0805-JW-103ELF, Technology="THICK FILM", Termination=SMD/SMT, Thickness=508um, Tolerance=5%, Width=1.25mm
R4 R11 R13: library part R1k-0805FTK, "Res Thick Film 0805 1K Ohm 5% 1/8W ±200ppm/°C Molded SMD SMD Paper Tape on Plastic Reel", Case Code (Imperial)=0805, Case Code (Metric)=2012, Manufacturer 1=Bourns, Max Operating Temperature=155°C, Max power dissipation=125mW, Min Operating Temperature=-55°C, Package Quantity=1, Resistance=1kR, Resistor Type="Thick Film", Temperature Coefficient=200ppm/°C, Tolerance=5%, Voltage Rating=150V, .Creator=GP, Case/Package=0805, Category="Chip SMD Resistors", ComponentLink1Description=https://datasheet.ciiva.com/11821/0900766b80fcdb72-11821134.pdf?src-supplier=RSComponents, ComponentLink1URL=https://datasheet.ciiva.com/11821/0900766b80fcdb72-11821134.pdf?src-supplier=RSComponents, ComponentLink2Description=https://datasheet.ciiva.com/15225/getdatasheetpartid-78155-15225381.pdf?src-supplier=Verical, ComponentLink2URL=https://datasheet.ciiva.com/15225/getdatasheetpartid-78155-15225381.pdf?src-supplier=Verical, ComponentLink3Description=https://datasheet.ciiva.com/22693/1902866-22693253.pdf?src-supplier=Element14, ComponentLink3URL=https://datasheet.ciiva.com/22693/1902866-22693253.pdf?src-supplier=Element14, ComponentLink4Description=https://datasheet.ciiva.com/7986/1856384-7986184.pdf?src-supplier=Element14, ComponentLink4URL=https://datasheet.ciiva.com/7986/1856384-7986184.pdf?src-supplier=Element14, ComponentLink5Description=https://datasheet.ciiva.com/7985/1856384-7985867.pdf?src-supplier=Element14, ComponentLink5URL=https://datasheet.ciiva.com/7985/1856384-7985867.pdf?src-supplier=Element14, ComponentLink6Description=https://datasheet.ciiva.com/30242/159chpreztr-30242765.pdf?src-supplier=Onlinecomponents.com, ComponentLink6URL=https://datasheet.ciiva.com/30242/159chpreztr-30242765.pdf?src-supplier=Onlinecomponents.com, ComponentLink7Description=https://datasheet.ciiva.com/6547/chpreztr-6547359.pdf?src-supplier=Digi-Key, ComponentLink7URL=https://datasheet.ciiva.com/6547/chpreztr-6547359.pdf?src-supplier=Digi-Key, Contact Plating=Tin, Depth=1.25mm, Features="Moisture Resistant", Height=0.5mm, Lead Free="Lead Free", Length=2mm, Manufacturer Part Number 1=CR0805-JW-102ELF, Military Standard=Not, Mount="Surface Mount", Number of Pins=2, Number of Terminations=2, Packaging="Tape and Reel", Power rating=125mW, Pricing 1="1=0,05930, 10=0,03510, 25=0,01790, 100=0,00800, 250=0,00790, 500=0,00590, 1000=0,00360, 3000=0,00350, 6000=0,00250 (USD)", Radiation Hardening=No, REACH SVHC="No SVHC", RoHS=Yes, Stock 1=27510, Supplier 1="Arrow Electronics", Supplier Part Number 1=CR0805-JW-102ELF, Termination=SMD/SMT, Thickness=508um, Voltage Rating (DC)=150V, Width=1.25mm
R12 R14 R15 R16: library part R470-0805FTK, "Res Thick Film 0805 470 Ohm 1% 1/8W ±100ppm/°C Molded SMD SMD Paper Tape on Plastic Reel", Case Code (Imperial)=0805, Case Code (Metric)=2012, Manufacturer 1=Bourns, Max Operating Temperature=155°C, Max power dissipation=125mW, Min Operating Temperature=-55°C, Resistance=470R, Resistance Tolerance=1%, Resistor Type="Thick Film", Temperature Coefficient=100ppm/°C, Voltage Rating=150V, .Creator=DR, Case/Package=0805, Category="Chip SMD Resistors", ComponentLink1Description=https://datasheet.ciiva.com/11808/0900766b80fcdb72-11808686.pdf?src-supplier=RSComponents, ComponentLink1URL=https://datasheet.ciiva.com/11808/0900766b80fcdb72-11808686.pdf?src-supplier=RSComponents, ComponentLink2Description=https://datasheet.ciiva.com/7985/1856384-7985880.pdf?src-supplier=Element14, ComponentLink2URL=https://datasheet.ciiva.com/7985/1856384-7985880.pdf?src-supplier=Element14, ComponentLink3Description=https://datasheet.ciiva.com/22693/1902866-22693247.pdf?src-supplier=Element14, ComponentLink3URL=https://datasheet.ciiva.com/22693/1902866-22693247.pdf?src-supplier=Element14, ComponentLink4Description=https://datasheet.ciiva.com/5541/chpreztr-5541930.pdf?src-supplier=Mouser, ComponentLink4URL=https://datasheet.ciiva.com/5541/chpreztr-5541930.pdf?src-supplier=Mouser, Construction=Rectangular, Contact Plating=Tin, Depth=1.25mm, Features="Moisture Resistant", Height=0.5mm, Length=2mm, Manufacturer Part Number 1=CR0805-FX-4700GLF, Military Standard=Not, Mount="Surface Mount", Number of Pins=2, Number of Terminations=2, Packaging="Tape and Reel", Power rating=125mW, Pricing 1="1=0,00990, 10=0,00980, 25=0,00950, 50=0,00940, 100=0,00930, 250=0,00920, 500=0,00910, 1000=0,00890, 3000=0,00870, 6000=0,00860 (USD)", Radiation Hardening=No, REACH SVHC="No SVHC", RoHS=Yes, Series=CR0805, Stock 1=12623, Supplier 1="Arrow Electronics", Supplier Part Number 1=CR0805-FX-4700GLF, Technology="THICK FILM", Termination=SMD/SMT, Thickness=508um, Tolerance=1%, Voltage Rating (DC)=150V
RNTC: library part NTC_10k_0805
SW1 SW2 SW3: library part SW_6x6
U1: library part LDO_10V-0.8/3V3-SOT223, "LDO Regulator Pos 3.3V 0.8A 4-Pin(3+Tab) SOT-223 T/R / IC REG LDO 3.3V 0.8A SOT223", Case/Package=SOT-223, Current Rating=800A, Dropout Voltage=1.2V, Manufacturer="Texas Instruments", Max Input Voltage=15V, Max Operating Temperature=125°C, Max Output Current=800mA, Max Supply Voltage=10V, Min Input Voltage=2.6V, Min Operating Temperature=-40°C, Min Supply Voltage=4.75V, Nominal Output Voltage=3.3V, Output Voltage Accuracy=1%, Package Quantity=1000, Quiescent Current=15mA, Supplier Part Number 1=LM1117IMP-3.3/NOPBCT-ND, .Creator=GP, Accuracy=1%, Category=LDO, ComponentLink1Description=Datasheet, ComponentLink1URL=https://www.ti.com/lit/ds/symlink/lm1117.pdf?HQS=dis-mous-null-mousermode-dsf-pf-null-wwe&DCM=yes&ref_url=https%3A%2F%2Fwww.mouser.de%2F&distId=26, ComponentLink2Description="Where buy it", ComponentLink2URL=https://www.mouser.es/ProductDetail/Texas-Instruments/LM1117IMP-33-NOPB?qs=X1J7HmVL2ZFbpN1TgOsjYQ%3D%3D, ComponentLink3Description=https://datasheet.ciiva.com/27051/1281318-27051810.pdf?src-supplier=Jameco, ComponentLink3URL=https://datasheet.ciiva.com/27051/1281318-27051810.pdf?src-supplier=Jameco, ComponentLink4Description=https://datasheet.ciiva.com/8042/1670636-8042261.pdf?src-supplier=Element14, ComponentLink4URL=https://datasheet.ciiva.com/8042/1670636-8042261.pdf?src-supplier=Element14, ComponentLink5Description=https://datasheet.ciiva.com/1570/1849796-1570171.pdf?src-supplier=Farnell, ComponentLink5URL=https://datasheet.ciiva.com/1570/1849796-1570171.pdf?src-supplier=Farnell, ComponentLink6Description=https://datasheet.ciiva.com/14149/lm1117-eng-tds-14149980.pdf?src-supplier=Distrelec, ComponentLink6URL=https://datasheet.ciiva.com/14149/lm1117-eng-tds-14149980.pdf?src-supplier=Distrelec, ComponentLink7Description=https://datasheet.ciiva.com/46386/1882372-46386042.pdf?src-supplier=Element14, ComponentLink7URL=https://datasheet.ciiva.com/46386/1882372-46386042.pdf?src-supplier=Element14, ComponentLink8Description=https://datasheet.ciiva.com/3223/lm1117-n-3223515.pdf?src-supplier=Avnet, ComponentLink8URL=https://datasheet.ciiva.com/3223/lm1117-n-3223515.pdf?src-supplier=Avnet, ComponentLink9Description=https://datasheet.ciiva.com/6580/lm1117-n-6580030.pdf?src-supplier=Digi-Key, ComponentLink9URL=https://datasheet.ciiva.com/6580/lm1117-n-6580030.pdf?src-supplier=Digi-Key, ComponentLink10Description=https://datasheet.ciiva.com/6580/lm1117-n-6580026.pdf?src-supplier=Digi-Key, ComponentLink10URL=https://datasheet.ciiva.com/6580/lm1117-n-6580026.pdf?src-supplier=Digi-Key, Height=1.6mm, Lead Free="Lead Free", Length=6.5mm, Manufacturer Part Number=LM1117IMP-3.3/NOPB, Min Current Limit=800mA, Mount="Surface Mount", Number of Outputs=1, Number of Pins=4, Number of Regulators=1, Output Current=800mA, Output Type=Fixed, Output Voltage=3.3V, Packaging="Tape and Reel", Polarity=Positive, Pricing 1="1=1,41000, 10=1,26300, 25=1,19920, 100=0,98500, 250=0,92072, 500=0,81366 (USD)", Radiation Hardening=No, REACH SVHC="No SVHC", RoHS=Yes, RoHS Compliant=Yes, Supplier 1=Digi-Key, Termination=SMD/SMT, Width=3.56mm
U2: "Mainstream Arm Cortex-M0+ MCU with 16 Kbytes of Flash memory, 12 Kbytes RAM, 48 MHz CPU, 2x USART, timers, ADC, comm. I/F, 2-3.6V", Manufacturer_Name=STMicroelectronics, Mouser Part Number=511-STM32C031K4T6, Datasheet Link=https://www.st.com/resource/en/datasheet/stm32c031c4.pdf, Geometry.Height=1.6mm, Manufacturer_Part_Number=STM32C031K4T6, Mouser Price/Stock=https://www.mouser.co.uk/ProductDetail/STMicroelectronics/STM32C031K4T6?qs=IPgv5n7u5QbiXsG7yxbPWw%3D%3D

## Via types
v1: diameter 0.7, hole 0.5, Top Layer to Bottom Layer, 18 vias
v2: diameter 1.27, hole 0.711, Top Layer to Bottom Layer, 7 vias

## Nets (pads, with @x,y where several pads share a name; then routed paths per layer and width w, separated by ;. In a path a pad name is that pad's centre, name@x,y a point inside that pad or via, vN(x,y) a via of type N, cw(c..) or ccw(c..) an arc to the next point about the centre after c; other vN are vias at no path point)
+3.3: C4.1 C5.1 J2.1 R1.1 R4.1 R5.1 R6.1 R7.1 R17.1 R18.1 RNTC.1 U1.2 U1.4 U2.4 | length 14.4
  Top Layer w0.254: R1.1@6.132,27.586 R1.1 R1.1@6.132,27.786 ; C5.1@9.347,29.867 C5.1 C5.1@9.63,30.15 ; RNTC.1@10.717,23.306 11.09,22.933 RNTC.1 ; R7.1@19.237,17.049 R7.1
  Bottom Layer w0.254: J2.1 5.235,30.861 5.961,31.587 R17.1 14.037,32.035 15.49,32.035 15.931,32.476 R18.1
+5: C3.1 J2.4 L1.2 Q1.C Q2.C U1.3 | length 71
  Top Layer w0.5: Q1.C 26.594,39.751 26.669,39.676 26.669,39.636 30.11,36.195 ; Q2.C 29.113,35.198 30.11,36.195 ; v2(31.623,43.053) 31.77,43.2 31.77,43.782 U1.3@32.879,44.891 ; U1.3 U1.3@32.879,44.891 ; L1.2 35.177,34.466 33.648,35.995 C3.1 ; 30.11,36.195 C3.1 ; U1.3@32.879,44.891 32.879,37.606 33.448,37.037 33.448,36.395 C3.1
  Bottom Layer w0.5: J2.4 2.32,33.621 1.47,33.621 0.889,34.202 0.889,39.243 2.413,40.767 13.97,40.767 16.256,43.053 v2(31.623,43.053)
+12: C1.1 D1.1 DCDC1.1 J1.1 | length 22.1
  Top Layer w0.5: C1.1 41.571,29.652 D1.1@42.291,30.372 ; J1.1 43.072,29.591 D1.1@42.291,30.372 ; DCDC1.1 48.133,36.919 42.291,31.077 D1.1 D1.1@42.291,30.372
GND: C1.2 C2.2 C3.2 C4.2 C5.2 C6.2 C7.2 C8.2 C11.2 D1.2 D4.K D5.K D6.A D7.K D8.A D9.K D10.K DCDC1.2 J1.2 J1.3 J2.3 J3.1 J4.1 J5.1 K1.C2 K2.C2 MH1.1 MH2.1 R10.2 SW1.4 SW2.4 SW3.4 U1.1 U2.5 | length 136.8
  Top Layer w0.254: J3.1 4.755,3.866 10.287,3.866 ; J2.3 J2.3@5.305,33.626 ; v2(8.763,27.94) 9.032,27.94 9.616,28.524 10.69,28.524 C5.2 10.832,28.681 U2.5 U2.5@12.526,30.62 ; D10.K 9.295,47.09 10.376,48.171 17.159,48.171 18.113,47.217 D9.K ; SW2.4 10.287,2.653 10.287,3.866 ; C7.2 12.515,19.053 13.725,19.053 14.079,19.407 16.268,19.407 17.199,18.476 C6.2 17.599,18.476 18.549,17.526 20.948,17.526 21.898,16.576 C8.2 22.098,15.515 22.479,15.134 v2(22.479,14.859) ; R10.2 18.059,22.697 C11.2 19.873,22.799 D8.A ; v2(17.526,44.704) 17.526,46.101 17.678,46.253 17.678,46.682 D9.K ; SW1.4 17.562,2.912 16.989,3.485 16.627,3.847 15.52,3.847 15.501,3.866 10.287,3.866 ; SW3.4@25.69,2.912 SW3.4 25.69,2.212 26.644,1.258 30.995,1.258 32.297,2.56 33.391,2.56 K2.C2 ; D7.K D5.K 23.649,43.712 22.18,45.181 19.97,45.181 18.113,47.038 D9.K ; C4.2 30.045,40.774 30.368,41.097 30.368,44.693 32.665,46.99 36.576,46.99 37.106,46.46 37.106,46.431 37.479,46.058 U1.1 ; C3.2 36.188,36.435 36.188,37.077 37.479,38.368 U1.1 ; D4.K 36.503,29.513 37.028,29.513 38.789,27.752 C1.2 39.189,27.752 40.214,26.727 D1.2 45.979,26.727 48.843,29.591 J1.2 ; C2.2 43.368,40.32 DCDC1.2 42.697,45.441 U1.1
  other v1: 4.191,42.589 55.499,42.97 2.191,43.339 6.191,43.339 53.499,43.72 57.499,43.72 1.441,45.339 6.941,45.339 52.749,45.72 58.249,45.72 2.191,47.339 6.191,47.339 53.499,47.72 57.499,47.72 4.191,48.089 55.499,48.47
K1_CTRL: D6.C K1.C1 Q1.E R12.1 | length 32.4
  Top Layer w0.254: R12.1 21.276,43.712 21.897,43.712 24.573,41.036 24.573,39.655 24.149,39.231 24.149,38.996 23.954,38.801 Q1.E 23.623,38.704 21.305,38.704 v2(21.209,38.608) ; D6.C 31.222,24.892 K1.C1
  Bottom Layer w0.254: v2(21.209,38.608) 29.591,30.226 D6.C
K2_CTRL: D8.C K2.C1 Q2.E R14.1 | length 41.3
  Top Layer w0.254: R14.1 28.778,43.601 28.361,43.601 25.146,40.386 25.146,37.051 27.367,34.83 27.367,31.05 26.785,30.468 26.785,30.106 26.59,29.911 Q2.E 26.513,26.259 D8.C 25.72,24.572 25.72,23.937 31.623,18.034 31.623,11.928 K2.C1 ; K2.C1@33.528,10.16 K2.C1@33.528,10.433
LED1: R11.1 U2.23 | length 3.7
  Top Layer w0.254: U2.23 18.693,39.936 18.693,40.319 R11.1
LED2: R13.1 U2.22 | length 8.3
  Top Layer w0.254: U2.22 17.633,37.5 18.055,37.922 19.926,37.922 23.776,34.072 R13.1
LED3: R15.1 U2.27 | length 4.2
  Top Layer w0.254: U2.27 13.092,37.745 12.67,38.167 12.67,39.912 13.743,40.985 R15.1
LED4: R16.1 U2.28 | length 4.8
  Top Layer w0.254: R16.1 11.022,40.985 11.47,40.537 11.47,37.991 U2.28
NetC2_1: C2.1 DCDC1.3 L1.1 | length 12.9
  Top Layer w0.5: L1.1 37.973,36.076 39.505,34.544 C2.1 41.468,40.96 DCDC1.3
NetD4_A: D4.A R4.2 | length 3.5
  Top Layer w0.254: R4.2 35.181,27.614 35.847,26.948 D4.A
NetD5_A: D5.A R12.2 | length 3.2
  Top Layer w0.254: R12.2 22.826,46.01 23.528,46.712 D5.A
NetD7_A: D7.A R14.2 | length 3
  Top Layer w0.254: D7.A 28.281,46.712 29.11,45.883 R14.2
NetD9_A: D9.A R15.2 | length 4.9
  Top Layer w0.254: R15.2 13.943,42.835 14.391,43.283 14.391,43.383 15.113,44.105 D9.A
NetD10_A: D10.A R16.2 | length 4.7
  Top Layer w0.254: R16.2 10.922,45.517 12.295,46.89 D10.A
NetJ6_1: J6.1 K1.COM | length 10.3
  Top Layer w0.254: K1.COM 52.07,14.986 J6.1
NetJ6_2: J6.2 K1.NO | length 10.9
  Top Layer w0.254: K1.NO 55.245,16.109 J6.2
NetJ7_1: J7.1 K2.COM | length 9.6
  Top Layer w0.254: K2.COM 54.493,2.55 J7.1
NetJ7_2: J7.2 K2.NO | length 8.5
  Top Layer w0.254: K2.NO 48.778,10.15 52.959,5.969 J7.2
NetQ1_B: Q1.B R11.2 | length 2.8
  Top Layer w0.254: R11.2 21.057,40.701 Q1.B
NetQ2_B: Q2.B R13.2 | length 2.8
  Top Layer w0.254: R13.2 25.808,32.222 26.219,31.811 Q2.B
NRST: J2.2 R1.2 U2.6 | length 14.4
  Top Layer w0.254: J2.2 4.282,29.119 R1.2 4.282,27.586 5.111,26.757 10.039,26.757 U2.6
SCL: J2.8 R18.2 U2.19 | length 24.7
  Top Layer w0.254: v1(15.24,32.639) 15.434,32.833 16.115,32.833 U2.19
  Bottom Layer w0.254: J2.8 3.72,37.301 3.72,35.396 4.445,34.671 16.546,34.671 R18.2 ; v1(15.24,32.639) 15.325,32.724 15.325,32.86 R18.2@16.791,34.326
SDA: J2.6 R17.2 U2.1 | length 16.1
  Top Layer w0.254: U2.1 10.454,32.638 11.15,33.334 11.871,33.334 v1(12.065,33.528)
  Bottom Layer w0.254: J2.6 2.54,35.687 3.72,34.507 3.72,33.235 4.633,32.322 10.859,32.322 v1(12.065,33.528) 13.498,33.528 R17.2
SW1: C6.1 J3.2 R5.2 SW1.1 | length 32.7
  Top Layer w0.254: J3.2 16.973,6.223 22.062,11.312 SW1.1 21.518,12.206 21.518,12.899 20.574,13.843 17.018,13.843 14.94,15.921 14.94,16.647 R5.2 17.247,16.728 C6.1
SW2: C7.1 J4.2 R6.2 SW2.1 | length 14.6
  Top Layer w0.254: J4.2 7.556,14.605 9.679,16.728 R6.2 12.09,16.728 C7.1 12.192,16.728 12.192,15.748 14.696,13.244 SW2.1
SW3: C8.1 J5.2 R7.2 SW3.1 | length 30.4
  Top Layer w0.254: J5.2 8.001,22.987 9.906,21.082 16.954,21.082 19.585,18.451 R7.2 22.073,18.451 C8.1 22.298,18.476 22.621,18.153 22.621,17.953 28.912,11.662 SW3.1
SWCLK: J2.7 U2.25 | length 16.3
  Top Layer w0.254: U2.25 13.914,38.941 13.914,39.447 14.218,39.751 15.534,39.751 16.383,40.6 v2(16.383,40.64)
  Bottom Layer w0.254: J2.7 14.478,38.481 16.383,40.386 v2(16.383,40.64)
SWDIO: J2.5 U2.24 | length 12.8
  Top Layer w0.254: v2(15.113,36.703) 15.307,36.897 15.307,37.682 U2.24
  Bottom Layer w0.254: J2.5 14.351,35.941 v2(15.113,36.703)
VNTC: C11.1 R10.1 RNTC.2 U2.7 | length 12.7
  Top Layer w0.254: U2.7 13.657,28.999 13.236,28.577 13.236,22.929 RNTC.2 13.834,22.733 15.648,24.547 R10.1 18.009,24.547 C11.1
pads on no net: SW1.2 SW1.3 SW2.2 SW2.3 SW3.2 SW3.3 U2.2 U2.3 U2.8 U2.9 U2.10 U2.11 U2.12 U2.13 U2.14 U2.15 U2.16 U2.17 U2.18 U2.20 U2.21 U2.26 U2.29 U2.30 U2.31 U2.32

## Polygon pours and split planes (outlines as drawn)
GND on Bottom Layer "GND_L02_P001" (solid, pour order 1): 0,2 0,48 cw(c2,48) 2,50 58,50 cw(c58,48) 60,48 60,2 cw(c58,2) 58,0 2,0 cw(c2,2)
+3.3 on Top Layer "+3.3_L01_P000" (solid, pour order 0): 0,2 0,48 cw(c2,48) 2,50 58,50 cw(c58,48) 60,48 60,2 cw(c58,2) 58,0 2,0 cw(c2,2)

## Silkscreen, mask and mechanical layers (free items; w line width, h text height)
Top Overlay:
  drawing of 34 lines, arcs and shapes, not listed
  text "Bernat Costa Cesari 2024" at 30.863,48.133 h2.5
  text "CSAL" at 47.117,46.482 h2.5
  text "CLK" at 8.128,37.846 h2.5 r90
  text "DIO" at 8.128,34.8 h2.5 r90
  text "GND" at 8.128,31.369 h2.5 r90
  text "3.3" at 8.128,28.704 h2.5 r90
  text "NRST" at 2.794,25.021 h2.5 r90
  text "SW1" at 5.336,25.019 h2.5
  text "24V" at 54.485,21.082 h2.5
  text "LED_A" at 54.485,19.131 h2.5
  text "SW2" at 5.209,16.51 h2.5
  text "LED1" at 55.247,16.51 h2.5
  text "SW3" at 5.336,8.128 h2.5
  text "LED2" at 55.501,8.001 h2.5
Bottom Overlay:
  drawing of 32 lines, arcs and shapes, not listed
Mechanical 1:
  the board outline again, w0.254